# EAGLE board 1.81_Grayscale_OLED_Breakout-Panel_v10 (EAGLE 7.7.0), part 1 of 6
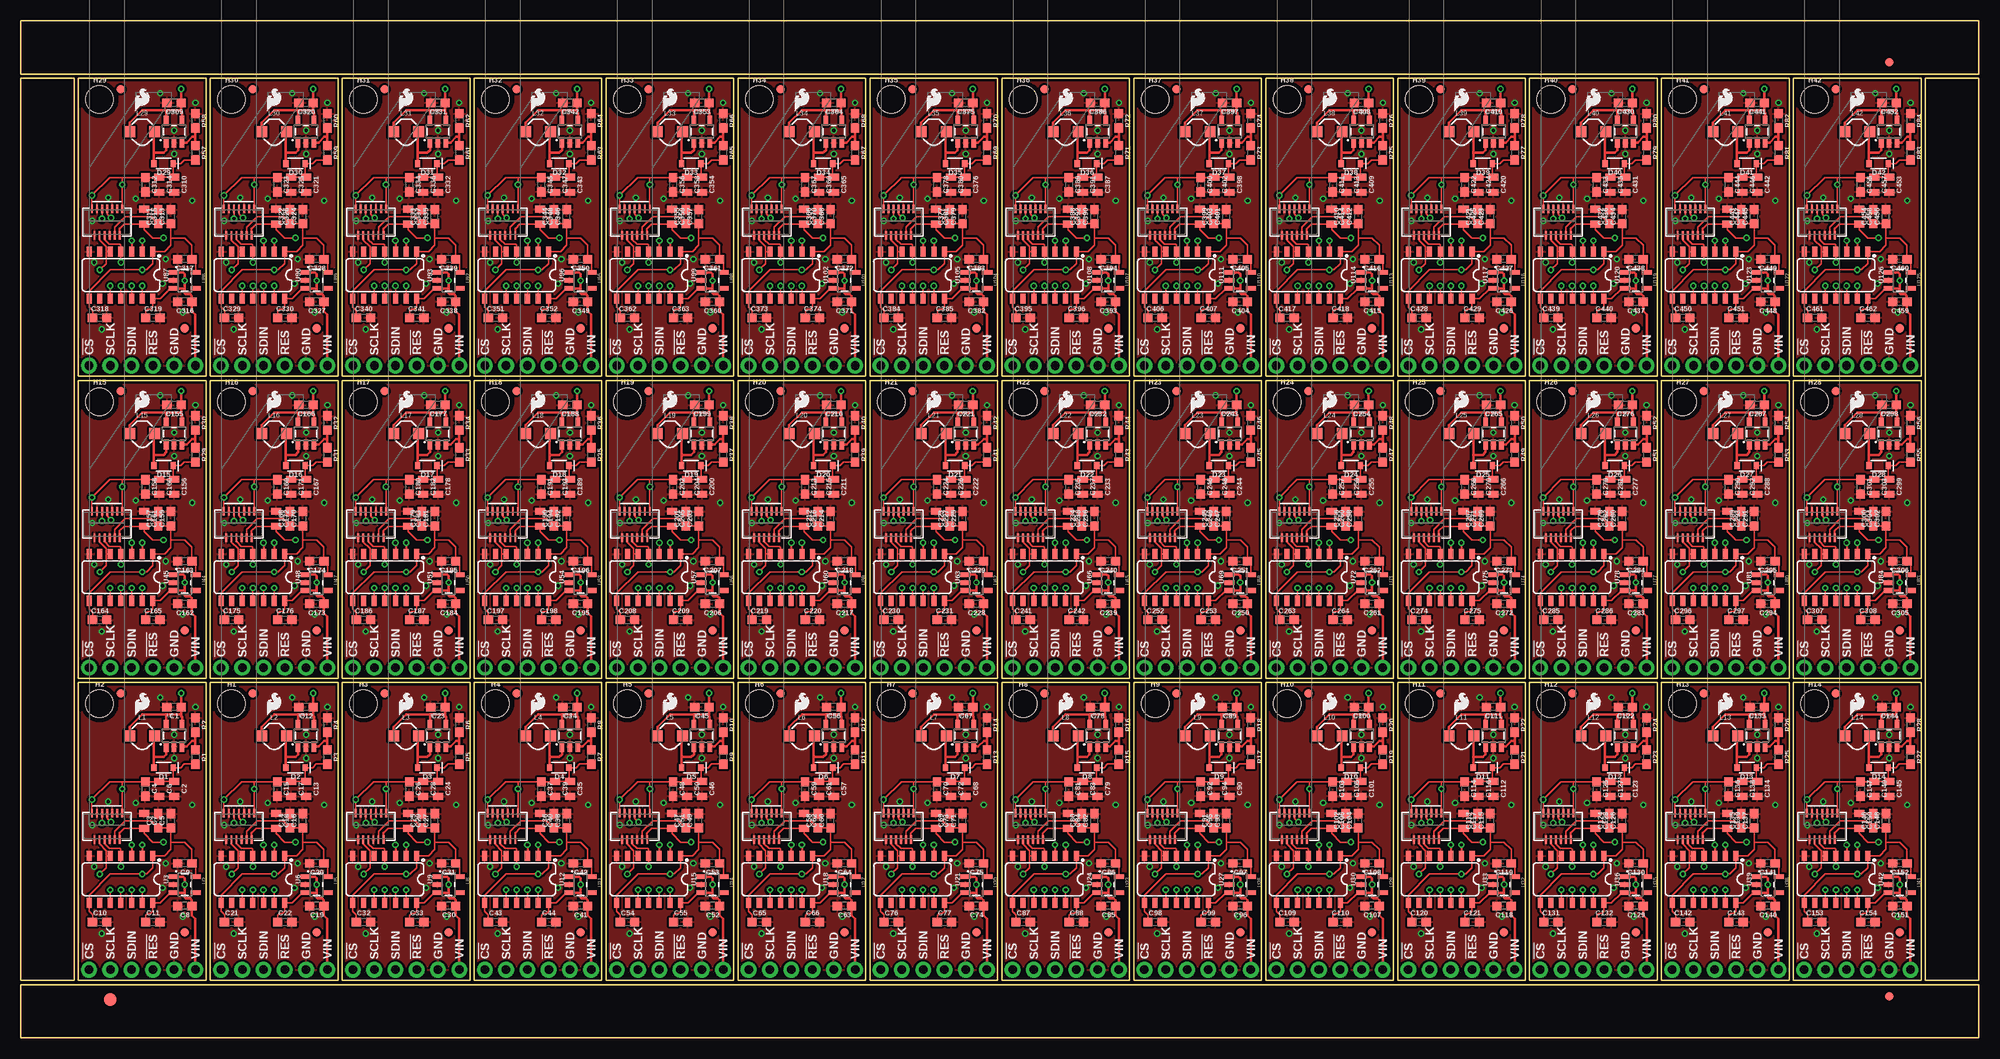
[diagram p0: board, top side]
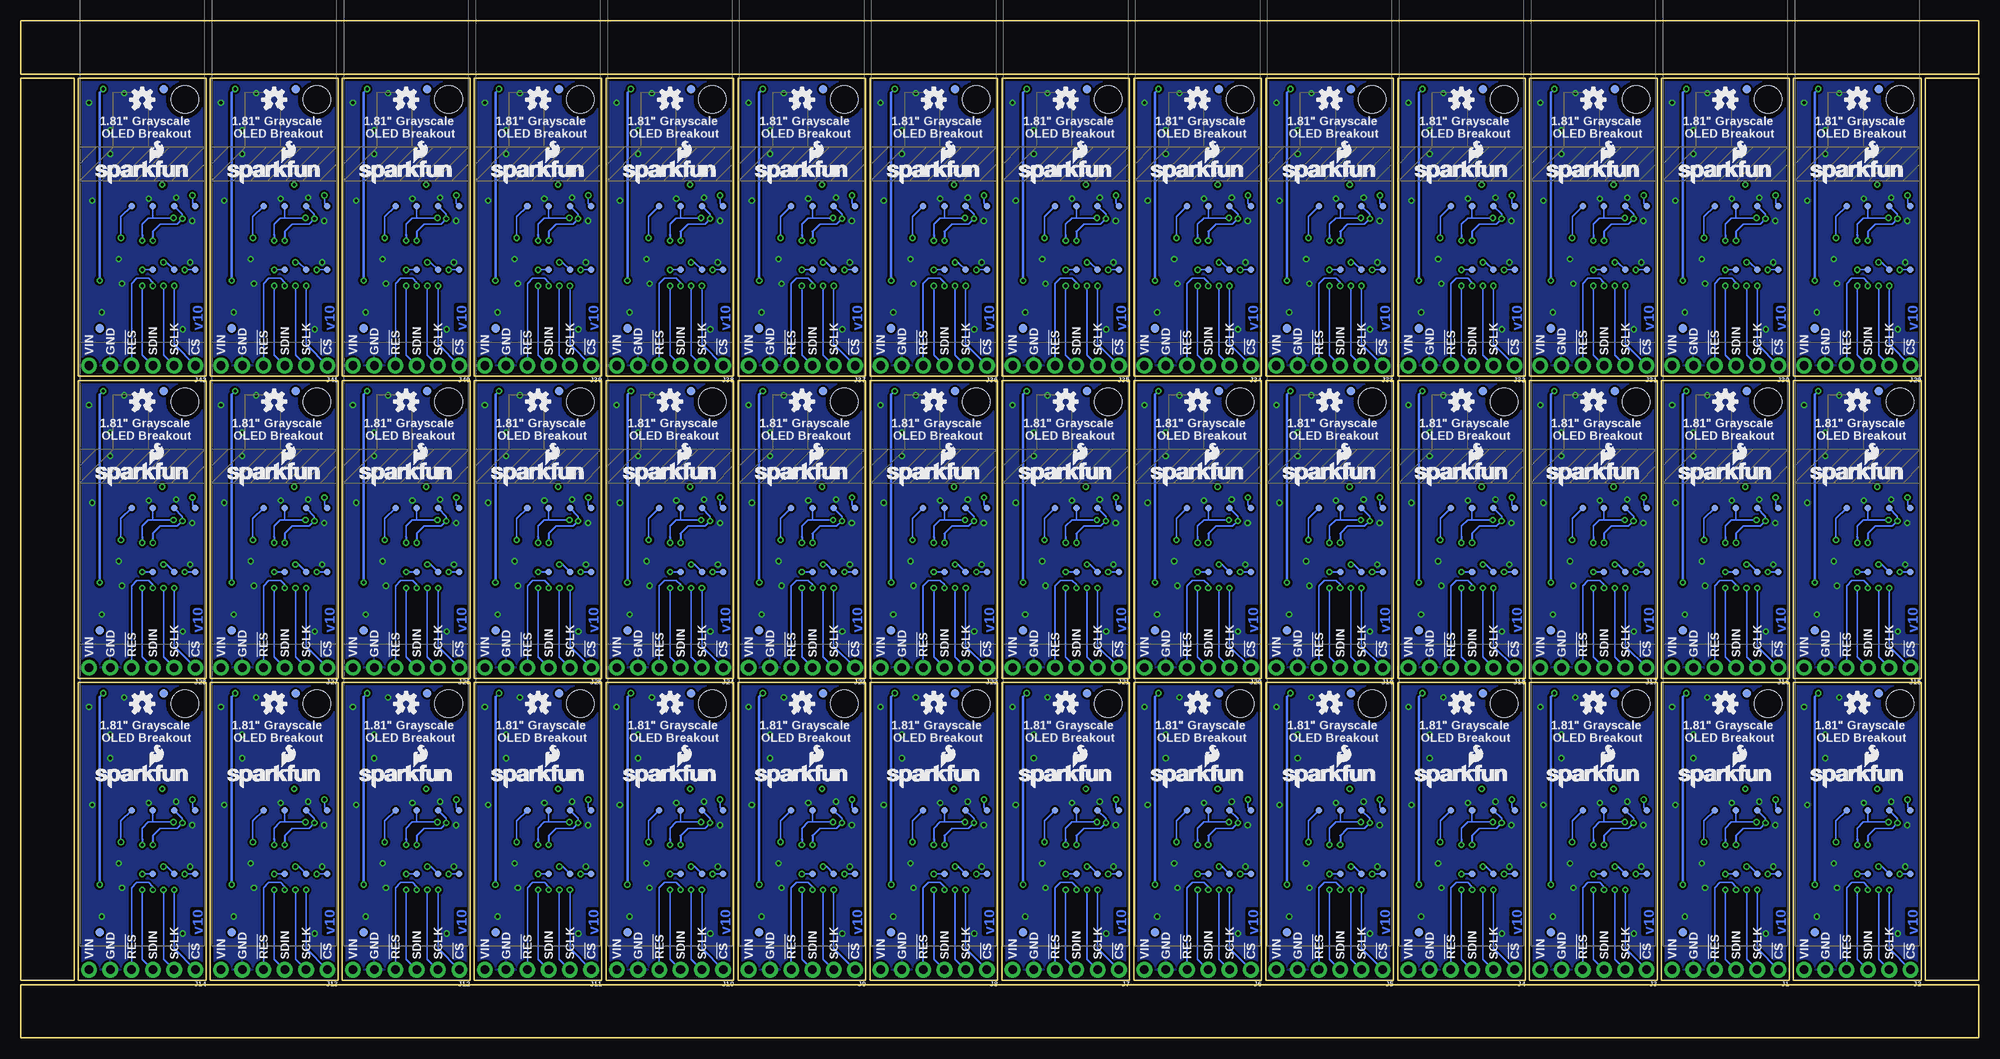
[diagram p1: board, bottom side, seen from below]

Size 233.68 x 121.41 mm. Coordinates in mm from the lower left corner, seen from the top.
Outline: 192 segments
Copper layers (1*16): Top 0.035mm / dielectric 1.5mm / Bottom 0.035mm
Design rules "SparkFun-2-layer-TIGHT": minimum track width 7mil, minimum drill 15mil, track to track 7mil, track to pad 7mil, pad to pad 7mil, via to via 7mil, smd to smd 7mil, copper to edge 7mil, drill to drill 7mil, minimum pad ring 7mil, minimum via ring 7mil, stop-mask expansion 4mil, vias tented up to drill 25mil, thermal gap 10mil

## Footprints (pad centres in the part's own frame; a part is rotated, then mirrored left to right if it is on the bottom)
0603 = smd 1.1 x 1: 1 -0.85,0; 2 0.85,0
0805 = smd 0.8 x 1.2: 1 -0.9,0; 2 0.9,0
SOD-323 = smd 0.63 x 0.83: A 1.15,0; C -1.15,0
OEL_1.8_FPC_Y3B = smd 0.23 x 1 bottom: 1 6,-11.795; 2 5.7,-14.955; 3 5.4,-11.795; 4 5.1,-14.955; 5 4.8,-11.795; 6 4.5,-14.955; 7 4.2,-11.795; 8 3.9,-14.955; 9 3.6,-11.795; 10 3.3,-14.955; 11 3,-11.795; 12 2.7,-14.955; 13 2.4,-11.795
FIDUCIAL-1.5X3 = smd 1.5 x 1.5: 1 0,0
FIDUCIAL-1X2 = smd 1 x 1: 1 0,0
STAND-OFF = hole 3.302: 0,0
1X06_NO_SILK = drill 1.016 pad 1.88: 1 0,0; 2 2.54,0; 3 5.08,0; 4 7.62,0; 5 10.16,0; 6 12.7,0
INDUCTOR_4.7UH = smd 1.3 x 1.3: P$1 -1.5,0; P$2 1.5,0
PAD.03X.03 = smd 0.762 x 0.762: P$1 0,0
SOT23-5 = smd 0.55 x 1.2: 1 -0.95,-1.3; 2 0,-1.3; 3 0.95,-1.3; 4 0.95,1.3; 5 -0.95,1.3
SO14 = smd 0.6 x 1.2: 1 -3.81,-2.8; 2 -2.54,-2.8; 3 -1.27,-2.8; 4 0,-2.8; 5 1.27,-2.8; 6 2.54,-2.8; 7 3.81,-2.8; 8 3.81,2.8; 9 2.54,2.8; 10 1.27,2.8; 11 0,2.8; 12 -1.27,2.8; 13 -2.54,2.8; 14 -3.81,2.8

## Placement (x,y rotation side)
C1  1.0uF  [0603]  18.29,39.5 180 top
C2  1.0uF  [0805]  18.29,29.72 270 top
C3  0.1uF  [0603]  16.38,25.91 90 top
C4  0.1uF/25V  [0603]  14.86,29.72 270 top
C5  1.0uF  [0603]  17.91,25.91 90 top
C6  2.2uF/25V  [0805]  16.51,29.72 270 top
C7  2.2uF/25V  [0805]  14.73,25.91 270 top
C8  1.0uF  [0603]  19.56,15.75 180 top
C9  2.2uF  [0603]  19.56,20.83 180 top
C10  0.1uF  [0603]  9.4,13.84 0 top
C11  0.1uF  [0603]  15.75,13.84 0 top
C12  1.0uF  [0603]  34.04,39.5 180 top
C13  1.0uF  [0805]  34.04,29.72 270 top
C14  0.1uF  [0603]  32.13,25.91 90 top
C15  0.1uF/25V  [0603]  30.61,29.72 270 top
C16  1.0uF  [0603]  33.66,25.91 90 top
C17  2.2uF/25V  [0805]  32.26,29.72 270 top
C18  2.2uF/25V  [0805]  30.48,25.91 270 top
C19  1.0uF  [0603]  35.31,15.75 180 top
C20  2.2uF  [0603]  35.31,20.83 180 top
C21  0.1uF  [0603]  25.15,13.84 0 top
C22  0.1uF  [0603]  31.5,13.84 0 top
C23  1.0uF  [0603]  49.78,39.5 180 top
C24  1.0uF  [0805]  49.78,29.72 270 top
C25  0.1uF  [0603]  47.88,25.91 90 top
C26  0.1uF/25V  [0603]  46.35,29.72 270 top
C27  1.0uF  [0603]  49.4,25.91 90 top
C28  2.2uF/25V  [0805]  48.01,29.72 270 top
C29  2.2uF/25V  [0805]  46.23,25.91 270 top
C30  1.0uF  [0603]  51.05,15.75 180 top
C31  2.2uF  [0603]  51.05,20.83 180 top
C32  0.1uF  [0603]  40.89,13.84 0 top
C33  0.1uF  [0603]  47.24,13.84 0 top
C34  1.0uF  [0603]  65.53,39.5 180 top
C35  1.0uF  [0805]  65.53,29.72 270 top
C36  0.1uF  [0603]  63.63,25.91 90 top
C37  0.1uF/25V  [0603]  62.1,29.72 270 top
C38  1.0uF  [0603]  65.15,25.91 90 top
C39  2.2uF/25V  [0805]  63.75,29.72 270 top
C40  2.2uF/25V  [0805]  61.98,25.91 270 top
C41  1.0uF  [0603]  66.8,15.75 180 top
C42  2.2uF  [0603]  66.8,20.83 180 top
C43  0.1uF  [0603]  56.64,13.84 0 top
C44  0.1uF  [0603]  62.99,13.84 0 top
C45  1.0uF  [0603]  81.28,39.5 180 top
C46  1.0uF  [0805]  81.28,29.72 270 top
C47  0.1uF  [0603]  79.38,25.91 90 top
C48  0.1uF/25V  [0603]  77.85,29.72 270 top
C49  1.0uF  [0603]  80.9,25.91 90 top
C50  2.2uF/25V  [0805]  79.5,29.72 270 top
C51  2.2uF/25V  [0805]  77.72,25.91 270 top
C52  1.0uF  [0603]  82.55,15.75 180 top
C53  2.2uF  [0603]  82.55,20.83 180 top
C54  0.1uF  [0603]  72.39,13.84 0 top
C55  0.1uF  [0603]  78.74,13.84 0 top
C56  1.0uF  [0603]  97.03,39.5 180 top
C57  1.0uF  [0805]  97.03,29.72 270 top
C58  0.1uF  [0603]  95.12,25.91 90 top
C59  0.1uF/25V  [0603]  93.6,29.72 270 top
C60  1.0uF  [0603]  96.65,25.91 90 top
C61  2.2uF/25V  [0805]  95.25,29.72 270 top
C62  2.2uF/25V  [0805]  93.47,25.91 270 top
C63  1.0uF  [0603]  98.3,15.75 180 top
C64  2.2uF  [0603]  98.3,20.83 180 top
C65  0.1uF  [0603]  88.14,13.84 0 top
C66  0.1uF  [0603]  94.49,13.84 0 top
C67  1.0uF  [0603]  112.78,39.5 180 top
C68  1.0uF  [0805]  112.78,29.72 270 top
C69  0.1uF  [0603]  110.87,25.91 90 top
C70  0.1uF/25V  [0603]  109.35,29.72 270 top
C71  1.0uF  [0603]  112.39,25.91 90 top
C72  2.2uF/25V  [0805]  111,29.72 270 top
C73  2.2uF/25V  [0805]  109.22,25.91 270 top
C74  1.0uF  [0603]  114.05,15.75 180 top
C75  2.2uF  [0603]  114.05,20.83 180 top
C76  0.1uF  [0603]  103.89,13.84 0 top
C77  0.1uF  [0603]  110.24,13.84 0 top
C78  1.0uF  [0603]  128.52,39.5 180 top
C79  1.0uF  [0805]  128.52,29.72 270 top
C80  0.1uF  [0603]  126.62,25.91 90 top
C81  0.1uF/25V  [0603]  125.09,29.72 270 top
C82  1.0uF  [0603]  128.14,25.91 90 top
C83  2.2uF/25V  [0805]  126.75,29.72 270 top
C84  2.2uF/25V  [0805]  124.97,25.91 270 top
C85  1.0uF  [0603]  129.79,15.75 180 top
C86  2.2uF  [0603]  129.79,20.83 180 top
C87  0.1uF  [0603]  119.63,13.84 0 top
C88  0.1uF  [0603]  125.98,13.84 0 top
C89  1.0uF  [0603]  144.27,39.5 180 top
C90  1.0uF  [0805]  144.27,29.72 270 top
C91  0.1uF  [0603]  142.37,25.91 90 top
C92  0.1uF/25V  [0603]  140.84,29.72 270 top
C93  1.0uF  [0603]  143.89,25.91 90 top
C94  2.2uF/25V  [0805]  142.49,29.72 270 top
C95  2.2uF/25V  [0805]  140.72,25.91 270 top
C96  1.0uF  [0603]  145.54,15.75 180 top
C97  2.2uF  [0603]  145.54,20.83 180 top
C98  0.1uF  [0603]  135.38,13.84 0 top
C99  0.1uF  [0603]  141.73,13.84 0 top
C100  1.0uF  [0603]  160.02,39.5 180 top
C101  1.0uF  [0805]  160.02,29.72 270 top
C102  0.1uF  [0603]  158.12,25.91 90 top
C103  0.1uF/25V  [0603]  156.59,29.72 270 top
C104  1.0uF  [0603]  159.64,25.91 90 top
C105  2.2uF/25V  [0805]  158.24,29.72 270 top
C106  2.2uF/25V  [0805]  156.46,25.91 270 top
C107  1.0uF  [0603]  161.29,15.75 180 top
C108  2.2uF  [0603]  161.29,20.83 180 top
C109  0.1uF  [0603]  151.13,13.84 0 top
C110  0.1uF  [0603]  157.48,13.84 0 top
C111  1.0uF  [0603]  175.77,39.5 180 top
C112  1.0uF  [0805]  175.77,29.72 270 top
C113  0.1uF  [0603]  173.86,25.91 90 top
C114  0.1uF/25V  [0603]  172.34,29.72 270 top
C115  1.0uF  [0603]  175.39,25.91 90 top
C116  2.2uF/25V  [0805]  173.99,29.72 270 top
C117  2.2uF/25V  [0805]  172.21,25.91 270 top
C118  1.0uF  [0603]  177.04,15.75 180 top
C119  2.2uF  [0603]  177.04,20.83 180 top
C120  0.1uF  [0603]  166.88,13.84 0 top
C121  0.1uF  [0603]  173.23,13.84 0 top
C122  1.0uF  [0603]  191.52,39.5 180 top
C123  1.0uF  [0805]  191.52,29.72 270 top
C124  0.1uF  [0603]  189.61,25.91 90 top
C125  0.1uF/25V  [0603]  188.09,29.72 270 top
C126  1.0uF  [0603]  191.13,25.91 90 top
C127  2.2uF/25V  [0805]  189.74,29.72 270 top
C128  2.2uF/25V  [0805]  187.96,25.91 270 top
C129  1.0uF  [0603]  192.79,15.75 180 top
C130  2.2uF  [0603]  192.79,20.83 180 top
C131  0.1uF  [0603]  182.63,13.84 0 top
C132  0.1uF  [0603]  188.98,13.84 0 top
C133  1.0uF  [0603]  207.26,39.5 180 top
C134  1.0uF  [0805]  207.26,29.72 270 top
C135  0.1uF  [0603]  205.36,25.91 90 top
C136  0.1uF/25V  [0603]  203.84,29.72 270 top
C137  1.0uF  [0603]  206.88,25.91 90 top
C138  2.2uF/25V  [0805]  205.49,29.72 270 top
C139  2.2uF/25V  [0805]  203.71,25.91 270 top
C140  1.0uF  [0603]  208.53,15.75 180 top
C141  2.2uF  [0603]  208.53,20.83 180 top
C142  0.1uF  [0603]  198.37,13.84 0 top
C143  0.1uF  [0603]  204.72,13.84 0 top
C144  1.0uF  [0603]  223.01,39.5 180 top
C145  1.0uF  [0805]  223.01,29.72 270 top
C146  0.1uF  [0603]  221.11,25.91 90 top
C147  0.1uF/25V  [0603]  219.58,29.72 270 top
C148  1.0uF  [0603]  222.63,25.91 90 top
C149  2.2uF/25V  [0805]  221.23,29.72 270 top
C150  2.2uF/25V  [0805]  219.46,25.91 270 top
C151  1.0uF  [0603]  224.28,15.75 180 top
C152  2.2uF  [0603]  224.28,20.83 180 top
C153  0.1uF  [0603]  214.12,13.84 0 top
C154  0.1uF  [0603]  220.47,13.84 0 top
C155  1.0uF  [0603]  18.29,75.56 180 top
C156  1.0uF  [0805]  18.29,65.79 270 top
C157  0.1uF  [0603]  16.38,61.98 90 top
C158  0.1uF/25V  [0603]  14.86,65.79 270 top
C159  1.0uF  [0603]  17.91,61.98 90 top
C160  2.2uF/25V  [0805]  16.51,65.79 270 top
C161  2.2uF/25V  [0805]  14.73,61.98 270 top
C162  1.0uF  [0603]  19.56,51.82 180 top
C163  2.2uF  [0603]  19.56,56.9 180 top
C164  0.1uF  [0603]  9.4,49.91 0 top
C165  0.1uF  [0603]  15.75,49.91 0 top
C166  1.0uF  [0603]  34.04,75.56 180 top
C167  1.0uF  [0805]  34.04,65.79 270 top
C168  0.1uF  [0603]  32.13,61.98 90 top
C169  0.1uF/25V  [0603]  30.61,65.79 270 top
C170  1.0uF  [0603]  33.66,61.98 90 top
C171  2.2uF/25V  [0805]  32.26,65.79 270 top
C172  2.2uF/25V  [0805]  30.48,61.98 270 top
C173  1.0uF  [0603]  35.31,51.82 180 top
C174  2.2uF  [0603]  35.31,56.9 180 top
C175  0.1uF  [0603]  25.15,49.91 0 top
C176  0.1uF  [0603]  31.5,49.91 0 top
C177  1.0uF  [0603]  49.78,75.56 180 top
C178  1.0uF  [0805]  49.78,65.79 270 top
C179  0.1uF  [0603]  47.88,61.98 90 top
C180  0.1uF/25V  [0603]  46.35,65.79 270 top
C181  1.0uF  [0603]  49.4,61.98 90 top
C182  2.2uF/25V  [0805]  48.01,65.79 270 top
C183  2.2uF/25V  [0805]  46.23,61.98 270 top
C184  1.0uF  [0603]  51.05,51.82 180 top
C185  2.2uF  [0603]  51.05,56.9 180 top
C186  0.1uF  [0603]  40.89,49.91 0 top
C187  0.1uF  [0603]  47.24,49.91 0 top
C188  1.0uF  [0603]  65.53,75.56 180 top
C189  1.0uF  [0805]  65.53,65.79 270 top
C190  0.1uF  [0603]  63.63,61.98 90 top
C191  0.1uF/25V  [0603]  62.1,65.79 270 top
C192  1.0uF  [0603]  65.15,61.98 90 top
C193  2.2uF/25V  [0805]  63.75,65.79 270 top
C194  2.2uF/25V  [0805]  61.98,61.98 270 top
C195  1.0uF  [0603]  66.8,51.82 180 top
C196  2.2uF  [0603]  66.8,56.9 180 top
C197  0.1uF  [0603]  56.64,49.91 0 top
C198  0.1uF  [0603]  62.99,49.91 0 top
C199  1.0uF  [0603]  81.28,75.56 180 top
C200  1.0uF  [0805]  81.28,65.79 270 top
C201  0.1uF  [0603]  79.38,61.98 90 top
C202  0.1uF/25V  [0603]  77.85,65.79 270 top
C203  1.0uF  [0603]  80.9,61.98 90 top
C204  2.2uF/25V  [0805]  79.5,65.79 270 top
C205  2.2uF/25V  [0805]  77.72,61.98 270 top
C206  1.0uF  [0603]  82.55,51.82 180 top
C207  2.2uF  [0603]  82.55,56.9 180 top
C208  0.1uF  [0603]  72.39,49.91 0 top
C209  0.1uF  [0603]  78.74,49.91 0 top
C210  1.0uF  [0603]  97.03,75.56 180 top
C211  1.0uF  [0805]  97.03,65.79 270 top
C212  0.1uF  [0603]  95.12,61.98 90 top
C213  0.1uF/25V  [0603]  93.6,65.79 270 top
C214  1.0uF  [0603]  96.65,61.98 90 top
C215  2.2uF/25V  [0805]  95.25,65.79 270 top
C216  2.2uF/25V  [0805]  93.47,61.98 270 top
C217  1.0uF  [0603]  98.3,51.82 180 top
C218  2.2uF  [0603]  98.3,56.9 180 top
C219  0.1uF  [0603]  88.14,49.91 0 top
C220  0.1uF  [0603]  94.49,49.91 0 top
C221  1.0uF  [0603]  112.78,75.56 180 top
C222  1.0uF  [0805]  112.78,65.79 270 top
C223  0.1uF  [0603]  110.87,61.98 90 top
C224  0.1uF/25V  [0603]  109.35,65.79 270 top
C225  1.0uF  [0603]  112.39,61.98 90 top
C226  2.2uF/25V  [0805]  111,65.79 270 top
C227  2.2uF/25V  [0805]  109.22,61.98 270 top
C228  1.0uF  [0603]  114.05,51.82 180 top
C229  2.2uF  [0603]  114.05,56.9 180 top
C230  0.1uF  [0603]  103.89,49.91 0 top
C231  0.1uF  [0603]  110.24,49.91 0 top
C232  1.0uF  [0603]  128.52,75.56 180 top
C233  1.0uF  [0805]  128.52,65.79 270 top
C234  0.1uF  [0603]  126.62,61.98 90 top
C235  0.1uF/25V  [0603]  125.09,65.79 270 top
C236  1.0uF  [0603]  128.14,61.98 90 top
C237  2.2uF/25V  [0805]  126.75,65.79 270 top
C238  2.2uF/25V  [0805]  124.97,61.98 270 top
C239  1.0uF  [0603]  129.79,51.82 180 top
C240  2.2uF  [0603]  129.79,56.9 180 top
C241  0.1uF  [0603]  119.63,49.91 0 top
C242  0.1uF  [0603]  125.98,49.91 0 top
C243  1.0uF  [0603]  144.27,75.56 180 top
C244  1.0uF  [0805]  144.27,65.79 270 top
C245  0.1uF  [0603]  142.37,61.98 90 top
C246  0.1uF/25V  [0603]  140.84,65.79 270 top
C247  1.0uF  [0603]  143.89,61.98 90 top
C248  2.2uF/25V  [0805]  142.49,65.79 270 top
C249  2.2uF/25V  [0805]  140.72,61.98 270 top
C250  1.0uF  [0603]  145.54,51.82 180 top
C251  2.2uF  [0603]  145.54,56.9 180 top
C252  0.1uF  [0603]  135.38,49.91 0 top
C253  0.1uF  [0603]  141.73,49.91 0 top
C254  1.0uF  [0603]  160.02,75.56 180 top
C255  1.0uF  [0805]  160.02,65.79 270 top
C256  0.1uF  [0603]  158.12,61.98 90 top
C257  0.1uF/25V  [0603]  156.59,65.79 270 top
C258  1.0uF  [0603]  159.64,61.98 90 top
C259  2.2uF/25V  [0805]  158.24,65.79 270 top
C260  2.2uF/25V  [0805]  156.46,61.98 270 top
C261  1.0uF  [0603]  161.29,51.82 180 top
C262  2.2uF  [0603]  161.29,56.9 180 top
C263  0.1uF  [0603]  151.13,49.91 0 top
C264  0.1uF  [0603]  157.48,49.91 0 top
C265  1.0uF  [0603]  175.77,75.56 180 top
C266  1.0uF  [0805]  175.77,65.79 270 top
C267  0.1uF  [0603]  173.86,61.98 90 top
C268  0.1uF/25V  [0603]  172.34,65.79 270 top
C269  1.0uF  [0603]  175.39,61.98 90 top
C270  2.2uF/25V  [0805]  173.99,65.79 270 top
C271  2.2uF/25V  [0805]  172.21,61.98 270 top
C272  1.0uF  [0603]  177.04,51.82 180 top
C273  2.2uF  [0603]  177.04,56.9 180 top
C274  0.1uF  [0603]  166.88,49.91 0 top
C275  0.1uF  [0603]  173.23,49.91 0 top
C276  1.0uF  [0603]  191.52,75.56 180 top
C277  1.0uF  [0805]  191.52,65.79 270 top
C278  0.1uF  [0603]  189.61,61.98 90 top
C279  0.1uF/25V  [0603]  188.09,65.79 270 top
C280  1.0uF  [0603]  191.13,61.98 90 top
C281  2.2uF/25V  [0805]  189.74,65.79 270 top
C282  2.2uF/25V  [0805]  187.96,61.98 270 top
C283  1.0uF  [0603]  192.79,51.82 180 top
C284  2.2uF  [0603]  192.79,56.9 180 top
C285  0.1uF  [0603]  182.63,49.91 0 top
C286  0.1uF  [0603]  188.98,49.91 0 top
C287  1.0uF  [0603]  207.26,75.56 180 top
C288  1.0uF  [0805]  207.26,65.79 270 top
C289  0.1uF  [0603]  205.36,61.98 90 top
C290  0.1uF/25V  [0603]  203.84,65.79 270 top
C291  1.0uF  [0603]  206.88,61.98 90 top
C292  2.2uF/25V  [0805]  205.49,65.79 270 top
C293  2.2uF/25V  [0805]  203.71,61.98 270 top
C294  1.0uF  [0603]  208.53,51.82 180 top
C295  2.2uF  [0603]  208.53,56.9 180 top
C296  0.1uF  [0603]  198.37,49.91 0 top
C297  0.1uF  [0603]  204.72,49.91 0 top
C298  1.0uF  [0603]  223.01,75.56 180 top
C299  1.0uF  [0805]  223.01,65.79 270 top
C300  0.1uF  [0603]  221.11,61.98 90 top
C301  0.1uF/25V  [0603]  219.58,65.79 270 top
C302  1.0uF  [0603]  222.63,61.98 90 top
C303  2.2uF/25V  [0805]  221.23,65.79 270 top
C304  2.2uF/25V  [0805]  219.46,61.98 270 top
C305  1.0uF  [0603]  224.28,51.82 180 top
C306  2.2uF  [0603]  224.28,56.9 180 top
C307  0.1uF  [0603]  214.12,49.91 0 top
C308  0.1uF  [0603]  220.47,49.91 0 top
C309  1.0uF  [0603]  18.29,111.63 180 top
C310  1.0uF  [0805]  18.29,101.85 270 top
C311  0.1uF  [0603]  16.38,98.04 90 top
C312  0.1uF/25V  [0603]  14.86,101.85 270 top
C313  1.0uF  [0603]  17.91,98.04 90 top
C314  2.2uF/25V  [0805]  16.51,101.85 270 top
C315  2.2uF/25V  [0805]  14.73,98.04 270 top
C316  1.0uF  [0603]  19.56,87.88 180 top
C317  2.2uF  [0603]  19.56,92.96 180 top
C318  0.1uF  [0603]  9.4,85.98 0 top
C319  0.1uF  [0603]  15.75,85.98 0 top
C320  1.0uF  [0603]  34.04,111.63 180 top
C321  1.0uF  [0805]  34.04,101.85 270 top
C322  0.1uF  [0603]  32.13,98.04 90 top
C323  0.1uF/25V  [0603]  30.61,101.85 270 top
C324  1.0uF  [0603]  33.66,98.04 90 top
C325  2.2uF/25V  [0805]  32.26,101.85 270 top
C326  2.2uF/25V  [0805]  30.48,98.04 270 top
C327  1.0uF  [0603]  35.31,87.88 180 top
C328  2.2uF  [0603]  35.31,92.96 180 top
C329  0.1uF  [0603]  25.15,85.98 0 top
C330  0.1uF  [0603]  31.5,85.98 0 top
C331  1.0uF  [0603]  49.78,111.63 180 top
C332  1.0uF  [0805]  49.78,101.85 270 top
C333  0.1uF  [0603]  47.88,98.04 90 top
C334  0.1uF/25V  [0603]  46.35,101.85 270 top
C335  1.0uF  [0603]  49.4,98.04 90 top
C336  2.2uF/25V  [0805]  48.01,101.85 270 top
C337  2.2uF/25V  [0805]  46.23,98.04 270 top
C338  1.0uF  [0603]  51.05,87.88 180 top
C339  2.2uF  [0603]  51.05,92.96 180 top
C340  0.1uF  [0603]  40.89,85.98 0 top
C341  0.1uF  [0603]  47.24,85.98 0 top
C342  1.0uF  [0603]  65.53,111.63 180 top
C343  1.0uF  [0805]  65.53,101.85 270 top
C344  0.1uF  [0603]  63.63,98.04 90 top
C345  0.1uF/25V  [0603]  62.1,101.85 270 top
C346  1.0uF  [0603]  65.15,98.04 90 top
C347  2.2uF/25V  [0805]  63.75,101.85 270 top
C348  2.2uF/25V  [0805]  61.98,98.04 270 top
C349  1.0uF  [0603]  66.8,87.88 180 top
C350  2.2uF  [0603]  66.8,92.96 180 top
C351  0.1uF  [0603]  56.64,85.98 0 top
C352  0.1uF  [0603]  62.99,85.98 0 top
C353  1.0uF  [0603]  81.28,111.63 180 top
C354  1.0uF  [0805]  81.28,101.85 270 top
C355  0.1uF  [0603]  79.38,98.04 90 top
C356  0.1uF/25V  [0603]  77.85,101.85 270 top
C357  1.0uF  [0603]  80.9,98.04 90 top
C358  2.2uF/25V  [0805]  79.5,101.85 270 top
C359  2.2uF/25V  [0805]  77.72,98.04 270 top
C360  1.0uF  [0603]  82.55,87.88 180 top
C361  2.2uF  [0603]  82.55,92.96 180 top
C362  0.1uF  [0603]  72.39,85.98 0 top
C363  0.1uF  [0603]  78.74,85.98 0 top
C364  1.0uF  [0603]  97.03,111.63 180 top
C365  1.0uF  [0805]  97.03,101.85 270 top
C366  0.1uF  [0603]  95.12,98.04 90 top
C367  0.1uF/25V  [0603]  93.6,101.85 270 top
C368  1.0uF  [0603]  96.65,98.04 90 top
C369  2.2uF/25V  [0805]  95.25,101.85 270 top
C370  2.2uF/25V  [0805]  93.47,98.04 270 top
C371  1.0uF  [0603]  98.3,87.88 180 top
C372  2.2uF  [0603]  98.3,92.96 180 top
C373  0.1uF  [0603]  88.14,85.98 0 top
C374  0.1uF  [0603]  94.49,85.98 0 top
C375  1.0uF  [0603]  112.78,111.63 180 top
C376  1.0uF  [0805]  112.78,101.85 270 top
C377  0.1uF  [0603]  110.87,98.04 90 top
C378  0.1uF/25V  [0603]  109.35,101.85 270 top
C379  1.0uF  [0603]  112.39,98.04 90 top
C380  2.2uF/25V  [0805]  111,101.85 270 top
C381  2.2uF/25V  [0805]  109.22,98.04 270 top
C382  1.0uF  [0603]  114.05,87.88 180 top
C383  2.2uF  [0603]  114.05,92.96 180 top
C384  0.1uF  [0603]  103.89,85.98 0 top
C385  0.1uF  [0603]  110.24,85.98 0 top
C386  1.0uF  [0603]  128.52,111.63 180 top
C387  1.0uF  [0805]  128.52,101.85 270 top
C388  0.1uF  [0603]  126.62,98.04 90 top
C389  0.1uF/25V  [0603]  125.09,101.85 270 top
C390  1.0uF  [0603]  128.14,98.04 90 top
C391  2.2uF/25V  [0805]  126.75,101.85 270 top
C392  2.2uF/25V  [0805]  124.97,98.04 270 top
C393  1.0uF  [0603]  129.79,87.88 180 top
C394  2.2uF  [0603]  129.79,92.96 180 top
C395  0.1uF  [0603]  119.63,85.98 0 top
C396  0.1uF  [0603]  125.98,85.98 0 top
C397  1.0uF  [0603]  144.27,111.63 180 top
C398  1.0uF  [0805]  144.27,101.85 270 top
C399  0.1uF  [0603]  142.37,98.04 90 top
C400  0.1uF/25V  [0603]  140.84,101.85 270 top
C401  1.0uF  [0603]  143.89,98.04 90 top
C402  2.2uF/25V  [0805]  142.49,101.85 270 top
C403  2.2uF/25V  [0805]  140.72,98.04 270 top
C404  1.0uF  [0603]  145.54,87.88 180 top
C405  2.2uF  [0603]  145.54,92.96 180 top
C406  0.1uF  [0603]  135.38,85.98 0 top
C407  0.1uF  [0603]  141.73,85.98 0 top
C408  1.0uF  [0603]  160.02,111.63 180 top
C409  1.0uF  [0805]  160.02,101.85 270 top
C410  0.1uF  [0603]  158.12,98.04 90 top
C411  0.1uF/25V  [0603]  156.59,101.85 270 top
C412  1.0uF  [0603]  159.64,98.04 90 top
C413  2.2uF/25V  [0805]  158.24,101.85 270 top
C414  2.2uF/25V  [0805]  156.46,98.04 270 top
C415  1.0uF  [0603]  161.29,87.88 180 top
C416  2.2uF  [0603]  161.29,92.96 180 top
C417  0.1uF  [0603]  151.13,85.98 0 top
C418  0.1uF  [0603]  157.48,85.98 0 top
C419  1.0uF  [0603]  175.77,111.63 180 top
C420  1.0uF  [0805]  175.77,101.85 270 top
C421  0.1uF  [0603]  173.86,98.04 90 top
C422  0.1uF/25V  [0603]  172.34,101.85 270 top
C423  1.0uF  [0603]  175.39,98.04 90 top
C424  2.2uF/25V  [0805]  173.99,101.85 270 top
C425  2.2uF/25V  [0805]  172.21,98.04 270 top
C426  1.0uF  [0603]  177.04,87.88 180 top
C427  2.2uF  [0603]  177.04,92.96 180 top
C428  0.1uF  [0603]  166.88,85.98 0 top
C429  0.1uF  [0603]  173.23,85.98 0 top
C430  1.0uF  [0603]  191.52,111.63 180 top
C431  1.0uF  [0805]  191.52,101.85 270 top
C432  0.1uF  [0603]  189.61,98.04 90 top
C433  0.1uF/25V  [0603]  188.09,101.85 270 top
C434  1.0uF  [0603]  191.13,98.04 90 top
C435  2.2uF/25V  [0805]  189.74,101.85 270 top
C436  2.2uF/25V  [0805]  187.96,98.04 270 top
C437  1.0uF  [0603]  192.79,87.88 180 top
C438  2.2uF  [0603]  192.79,92.96 180 top
C439  0.1uF  [0603]  182.63,85.98 0 top
C440  0.1uF  [0603]  188.98,85.98 0 top
C441  1.0uF  [0603]  207.26,111.63 180 top
C442  1.0uF  [0805]  207.26,101.85 270 top
C443  0.1uF  [0603]  205.36,98.04 90 top
C444  0.1uF/25V  [0603]  203.84,101.85 270 top
C445  1.0uF  [0603]  206.88,98.04 90 top
C446  2.2uF/25V  [0805]  205.49,101.85 270 top
C447  2.2uF/25V  [0805]  203.71,98.04 270 top
C448  1.0uF  [0603]  208.53,87.88 180 top
C449  2.2uF  [0603]  208.53,92.96 180 top
C450  0.1uF  [0603]  198.37,85.98 0 top
C451  0.1uF  [0603]  204.72,85.98 0 top
C452  1.0uF  [0603]  223.01,111.63 180 top
C453  1.0uF  [0805]  223.01,101.85 270 top
C454  0.1uF  [0603]  221.11,98.04 90 top
C455  0.1uF/25V  [0603]  219.58,101.85 270 top
C456  1.0uF  [0603]  222.63,98.04 90 top
C457  2.2uF/25V  [0805]  221.23,101.85 270 top
C458  2.2uF/25V  [0805]  219.46,98.04 270 top
C459  1.0uF  [0603]  224.28,87.88 180 top
C460  2.2uF  [0603]  224.28,92.96 180 top
C461  0.1uF  [0603]  214.12,85.98 0 top
C462  0.1uF  [0603]  220.47,85.98 0 top
D1  1A/23V/620mV  [SOD-323]  17.02,32.26 180 top
D2  1A/23V/620mV  [SOD-323]  32.77,32.26 180 top
D3  1A/23V/620mV  [SOD-323]  48.51,32.26 180 top
D4  1A/23V/620mV  [SOD-323]  64.26,32.26 180 top
D5  1A/23V/620mV  [SOD-323]  80.01,32.26 180 top
D6  1A/23V/620mV  [SOD-323]  95.76,32.26 180 top
D7  1A/23V/620mV  [SOD-323]  111.51,32.26 180 top
D8  1A/23V/620mV  [SOD-323]  127.25,32.26 180 top
D9  1A/23V/620mV  [SOD-323]  143,32.26 180 top
D10  1A/23V/620mV  [SOD-323]  158.75,32.26 180 top
D11  1A/23V/620mV  [SOD-323]  174.5,32.26 180 top
D12  1A/23V/620mV  [SOD-323]  190.25,32.26 180 top
D13  1A/23V/620mV  [SOD-323]  205.99,32.26 180 top
D14  1A/23V/620mV  [SOD-323]  221.74,32.26 180 top
D15  1A/23V/620mV  [SOD-323]  17.02,68.33 180 top
D16  1A/23V/620mV  [SOD-323]  32.77,68.33 180 top
D17  1A/23V/620mV  [SOD-323]  48.51,68.33 180 top
D18  1A/23V/620mV  [SOD-323]  64.26,68.33 180 top
D19  1A/23V/620mV  [SOD-323]  80.01,68.33 180 top
D20  1A/23V/620mV  [SOD-323]  95.76,68.33 180 top
D21  1A/23V/620mV  [SOD-323]  111.51,68.33 180 top
D22  1A/23V/620mV  [SOD-323]  127.25,68.33 180 top
D23  1A/23V/620mV  [SOD-323]  143,68.33 180 top
D24  1A/23V/620mV  [SOD-323]  158.75,68.33 180 top
D25  1A/23V/620mV  [SOD-323]  174.5,68.33 180 top
D26  1A/23V/620mV  [SOD-323]  190.25,68.33 180 top
D27  1A/23V/620mV  [SOD-323]  205.99,68.33 180 top
D28  1A/23V/620mV  [SOD-323]  221.74,68.33 180 top
D29  1A/23V/620mV  [SOD-323]  17.02,104.39 180 top
D30  1A/23V/620mV  [SOD-323]  32.77,104.39 180 top
D31  1A/23V/620mV  [SOD-323]  48.51,104.39 180 top
D32  1A/23V/620mV  [SOD-323]  64.26,104.39 180 top
D33  1A/23V/620mV  [SOD-323]  80.01,104.39 180 top
D34  1A/23V/620mV  [SOD-323]  95.76,104.39 180 top
D35  1A/23V/620mV  [SOD-323]  111.51,104.39 180 top
D36  1A/23V/620mV  [SOD-323]  127.25,104.39 180 top
D37  1A/23V/620mV  [SOD-323]  143,104.39 180 top
D38  1A/23V/620mV  [SOD-323]  158.75,104.39 180 top
D39  1A/23V/620mV  [SOD-323]  174.5,104.39 180 top
D40  1A/23V/620mV  [SOD-323]  190.25,104.39 180 top
D41  1A/23V/620mV  [SOD-323]  205.99,104.39 180 top
D42  1A/23V/620mV  [SOD-323]  221.74,104.39 180 top
DS1  OEL_1.8OEL_Y3B  [OEL_1.8_FPC_Y3B]  14.48,38.61 0 bottom
DS2  OEL_1.8OEL_Y3B  [OEL_1.8_FPC_Y3B]  30.23,38.61 0 bottom
DS3  OEL_1.8OEL_Y3B  [OEL_1.8_FPC_Y3B]  45.97,38.61 0 bottom
DS4  OEL_1.8OEL_Y3B  [OEL_1.8_FPC_Y3B]  61.72,38.61 0 bottom
DS5  OEL_1.8OEL_Y3B  [OEL_1.8_FPC_Y3B]  77.47,38.61 0 bottom
DS6  OEL_1.8OEL_Y3B  [OEL_1.8_FPC_Y3B]  93.22,38.61 0 bottom
DS7  OEL_1.8OEL_Y3B  [OEL_1.8_FPC_Y3B]  108.97,38.61 0 bottom
DS8  OEL_1.8OEL_Y3B  [OEL_1.8_FPC_Y3B]  124.71,38.61 0 bottom
DS9  OEL_1.8OEL_Y3B  [OEL_1.8_FPC_Y3B]  140.46,38.61 0 bottom
DS10  OEL_1.8OEL_Y3B  [OEL_1.8_FPC_Y3B]  156.21,38.61 0 bottom
DS11  OEL_1.8OEL_Y3B  [OEL_1.8_FPC_Y3B]  171.96,38.61 0 bottom
DS12  OEL_1.8OEL_Y3B  [OEL_1.8_FPC_Y3B]  187.71,38.61 0 bottom
DS13  OEL_1.8OEL_Y3B  [OEL_1.8_FPC_Y3B]  203.45,38.61 0 bottom
DS14  OEL_1.8OEL_Y3B  [OEL_1.8_FPC_Y3B]  219.2,38.61 0 bottom
DS15  OEL_1.8OEL_Y3B  [OEL_1.8_FPC_Y3B]  14.48,74.68 0 bottom
DS16  OEL_1.8OEL_Y3B  [OEL_1.8_FPC_Y3B]  30.23,74.68 0 bottom
DS17  OEL_1.8OEL_Y3B  [OEL_1.8_FPC_Y3B]  45.97,74.68 0 bottom
DS18  OEL_1.8OEL_Y3B  [OEL_1.8_FPC_Y3B]  61.72,74.68 0 bottom
DS19  OEL_1.8OEL_Y3B  [OEL_1.8_FPC_Y3B]  77.47,74.68 0 bottom
DS20  OEL_1.8OEL_Y3B  [OEL_1.8_FPC_Y3B]  93.22,74.68 0 bottom
DS21  OEL_1.8OEL_Y3B  [OEL_1.8_FPC_Y3B]  108.97,74.68 0 bottom
DS22  OEL_1.8OEL_Y3B  [OEL_1.8_FPC_Y3B]  124.71,74.68 0 bottom
DS23  OEL_1.8OEL_Y3B  [OEL_1.8_FPC_Y3B]  140.46,74.68 0 bottom
DS24  OEL_1.8OEL_Y3B  [OEL_1.8_FPC_Y3B]  156.21,74.68 0 bottom
DS25  OEL_1.8OEL_Y3B  [OEL_1.8_FPC_Y3B]  171.96,74.68 0 bottom
DS26  OEL_1.8OEL_Y3B  [OEL_1.8_FPC_Y3B]  187.71,74.68 0 bottom
DS27  OEL_1.8OEL_Y3B  [OEL_1.8_FPC_Y3B]  203.45,74.68 0 bottom
DS28  OEL_1.8OEL_Y3B  [OEL_1.8_FPC_Y3B]  219.2,74.68 0 bottom
DS29  OEL_1.8OEL_Y3B  [OEL_1.8_FPC_Y3B]  14.48,110.74 0 bottom
DS30  OEL_1.8OEL_Y3B  [OEL_1.8_FPC_Y3B]  30.23,110.74 0 bottom
DS31  OEL_1.8OEL_Y3B  [OEL_1.8_FPC_Y3B]  45.97,110.74 0 bottom
DS32  OEL_1.8OEL_Y3B  [OEL_1.8_FPC_Y3B]  61.72,110.74 0 bottom
DS33  OEL_1.8OEL_Y3B  [OEL_1.8_FPC_Y3B]  77.47,110.74 0 bottom
DS34  OEL_1.8OEL_Y3B  [OEL_1.8_FPC_Y3B]  93.22,110.74 0 bottom
DS35  OEL_1.8OEL_Y3B  [OEL_1.8_FPC_Y3B]  108.97,110.74 0 bottom
DS36  OEL_1.8OEL_Y3B  [OEL_1.8_FPC_Y3B]  124.71,110.74 0 bottom
DS37  OEL_1.8OEL_Y3B  [OEL_1.8_FPC_Y3B]  140.46,110.74 0 bottom
DS38  OEL_1.8OEL_Y3B  [OEL_1.8_FPC_Y3B]  156.21,110.74 0 bottom
DS39  OEL_1.8OEL_Y3B  [OEL_1.8_FPC_Y3B]  171.96,110.74 0 bottom
DS40  OEL_1.8OEL_Y3B  [OEL_1.8_FPC_Y3B]  187.71,110.74 0 bottom
DS41  OEL_1.8OEL_Y3B  [OEL_1.8_FPC_Y3B]  203.45,110.74 0 bottom
DS42  OEL_1.8OEL_Y3B  [OEL_1.8_FPC_Y3B]  219.2,110.74 0 bottom
E$1  [FIDUCIAL-1.5X3]  10.67,4.57 0 top
E$5  [FIDUCIAL-1X2]  223.01,116.46 270 top
E$6  [FIDUCIAL-1X2]  223.01,4.95 90 top
FD1  FIDUCIAL1X2  [FIDUCIAL-1X2]  19.56,12.57 0 top
FD2  FIDUCIAL1X2  [FIDUCIAL-1X2]  11.94,41.15 0 top
FD3  FIDUCIAL1X2  [FIDUCIAL-1X2]  19.56,12.57 0 bottom
FD4  FIDUCIAL1X2  [FIDUCIAL-1X2]  11.94,41.15 0 bottom
FD5  FIDUCIAL1X2  [FIDUCIAL-1X2]  35.31,12.57 0 top
FD6  FIDUCIAL1X2  [FIDUCIAL-1X2]  27.69,41.15 0 top
FD7  FIDUCIAL1X2  [FIDUCIAL-1X2]  35.31,12.57 0 bottom
FD8  FIDUCIAL1X2  [FIDUCIAL-1X2]  27.69,41.15 0 bottom
FD9  FIDUCIAL1X2  [FIDUCIAL-1X2]  51.05,12.57 0 top
FD10  FIDUCIAL1X2  [FIDUCIAL-1X2]  43.43,41.15 0 top
FD11  FIDUCIAL1X2  [FIDUCIAL-1X2]  51.05,12.57 0 bottom
FD12  FIDUCIAL1X2  [FIDUCIAL-1X2]  43.43,41.15 0 bottom
FD13  FIDUCIAL1X2  [FIDUCIAL-1X2]  66.8,12.57 0 top
FD14  FIDUCIAL1X2  [FIDUCIAL-1X2]  59.18,41.15 0 top
FD15  FIDUCIAL1X2  [FIDUCIAL-1X2]  66.8,12.57 0 bottom
FD16  FIDUCIAL1X2  [FIDUCIAL-1X2]  59.18,41.15 0 bottom
FD17  FIDUCIAL1X2  [FIDUCIAL-1X2]  82.55,12.57 0 top
FD18  FIDUCIAL1X2  [FIDUCIAL-1X2]  74.93,41.15 0 top
FD19  FIDUCIAL1X2  [FIDUCIAL-1X2]  82.55,12.57 0 bottom
FD20  FIDUCIAL1X2  [FIDUCIAL-1X2]  74.93,41.15 0 bottom
FD21  FIDUCIAL1X2  [FIDUCIAL-1X2]  98.3,12.57 0 top
FD22  FIDUCIAL1X2  [FIDUCIAL-1X2]  90.68,41.15 0 top
FD23  FIDUCIAL1X2  [FIDUCIAL-1X2]  98.3,12.57 0 bottom
FD24  FIDUCIAL1X2  [FIDUCIAL-1X2]  90.68,41.15 0 bottom
FD25  FIDUCIAL1X2  [FIDUCIAL-1X2]  114.05,12.57 0 top
FD26  FIDUCIAL1X2  [FIDUCIAL-1X2]  106.43,41.15 0 top
FD27  FIDUCIAL1X2  [FIDUCIAL-1X2]  114.05,12.57 0 bottom
FD28  FIDUCIAL1X2  [FIDUCIAL-1X2]  106.43,41.15 0 bottom
FD29  FIDUCIAL1X2  [FIDUCIAL-1X2]  129.79,12.57 0 top
FD30  FIDUCIAL1X2  [FIDUCIAL-1X2]  122.17,41.15 0 top
FD31  FIDUCIAL1X2  [FIDUCIAL-1X2]  129.79,12.57 0 bottom
FD32  FIDUCIAL1X2  [FIDUCIAL-1X2]  122.17,41.15 0 bottom
FD33  FIDUCIAL1X2  [FIDUCIAL-1X2]  145.54,12.57 0 top
FD34  FIDUCIAL1X2  [FIDUCIAL-1X2]  137.92,41.15 0 top
FD35  FIDUCIAL1X2  [FIDUCIAL-1X2]  145.54,12.57 0 bottom
FD36  FIDUCIAL1X2  [FIDUCIAL-1X2]  137.92,41.15 0 bottom
FD37  FIDUCIAL1X2  [FIDUCIAL-1X2]  161.29,12.57 0 top
FD38  FIDUCIAL1X2  [FIDUCIAL-1X2]  153.67,41.15 0 top
FD39  FIDUCIAL1X2  [FIDUCIAL-1X2]  161.29,12.57 0 bottom
FD40  FIDUCIAL1X2  [FIDUCIAL-1X2]  153.67,41.15 0 bottom
FD41  FIDUCIAL1X2  [FIDUCIAL-1X2]  177.04,12.57 0 top
FD42  FIDUCIAL1X2  [FIDUCIAL-1X2]  169.42,41.15 0 top
FD43  FIDUCIAL1X2  [FIDUCIAL-1X2]  177.04,12.57 0 bottom
FD44  FIDUCIAL1X2  [FIDUCIAL-1X2]  169.42,41.15 0 bottom
FD45  FIDUCIAL1X2  [FIDUCIAL-1X2]  192.79,12.57 0 top
FD46  FIDUCIAL1X2  [FIDUCIAL-1X2]  185.17,41.15 0 top
FD47  FIDUCIAL1X2  [FIDUCIAL-1X2]  192.79,12.57 0 bottom
FD48  FIDUCIAL1X2  [FIDUCIAL-1X2]  185.17,41.15 0 bottom
FD49  FIDUCIAL1X2  [FIDUCIAL-1X2]  208.53,12.57 0 top
FD50  FIDUCIAL1X2  [FIDUCIAL-1X2]  200.91,41.15 0 top
FD51  FIDUCIAL1X2  [FIDUCIAL-1X2]  208.53,12.57 0 bottom
FD52  FIDUCIAL1X2  [FIDUCIAL-1X2]  200.91,41.15 0 bottom
FD53  FIDUCIAL1X2  [FIDUCIAL-1X2]  224.28,12.57 0 top
FD54  FIDUCIAL1X2  [FIDUCIAL-1X2]  216.66,41.15 0 top
FD55  FIDUCIAL1X2  [FIDUCIAL-1X2]  224.28,12.57 0 bottom
FD56  FIDUCIAL1X2  [FIDUCIAL-1X2]  216.66,41.15 0 bottom
FD57  FIDUCIAL1X2  [FIDUCIAL-1X2]  19.56,48.64 0 top
FD58  FIDUCIAL1X2  [FIDUCIAL-1X2]  11.94,77.22 0 top
FD59  FIDUCIAL1X2  [FIDUCIAL-1X2]  19.56,48.64 0 bottom
FD60  FIDUCIAL1X2  [FIDUCIAL-1X2]  11.94,77.22 0 bottom
FD61  FIDUCIAL1X2  [FIDUCIAL-1X2]  35.31,48.64 0 top
FD62  FIDUCIAL1X2  [FIDUCIAL-1X2]  27.69,77.22 0 top
FD63  FIDUCIAL1X2  [FIDUCIAL-1X2]  35.31,48.64 0 bottom
FD64  FIDUCIAL1X2  [FIDUCIAL-1X2]  27.69,77.22 0 bottom
FD65  FIDUCIAL1X2  [FIDUCIAL-1X2]  51.05,48.64 0 top
FD66  FIDUCIAL1X2  [FIDUCIAL-1X2]  43.43,77.22 0 top
FD67  FIDUCIAL1X2  [FIDUCIAL-1X2]  51.05,48.64 0 bottom
FD68  FIDUCIAL1X2  [FIDUCIAL-1X2]  43.43,77.22 0 bottom
FD69  FIDUCIAL1X2  [FIDUCIAL-1X2]  66.8,48.64 0 top
FD70  FIDUCIAL1X2  [FIDUCIAL-1X2]  59.18,77.22 0 top
FD71  FIDUCIAL1X2  [FIDUCIAL-1X2]  66.8,48.64 0 bottom
FD72  FIDUCIAL1X2  [FIDUCIAL-1X2]  59.18,77.22 0 bottom
FD73  FIDUCIAL1X2  [FIDUCIAL-1X2]  82.55,48.64 0 top
FD74  FIDUCIAL1X2  [FIDUCIAL-1X2]  74.93,77.22 0 top
FD75  FIDUCIAL1X2  [FIDUCIAL-1X2]  82.55,48.64 0 bottom
FD76  FIDUCIAL1X2  [FIDUCIAL-1X2]  74.93,77.22 0 bottom
FD77  FIDUCIAL1X2  [FIDUCIAL-1X2]  98.3,48.64 0 top
FD78  FIDUCIAL1X2  [FIDUCIAL-1X2]  90.68,77.22 0 top
FD79  FIDUCIAL1X2  [FIDUCIAL-1X2]  98.3,48.64 0 bottom
FD80  FIDUCIAL1X2  [FIDUCIAL-1X2]  90.68,77.22 0 bottom
FD81  FIDUCIAL1X2  [FIDUCIAL-1X2]  114.05,48.64 0 top
FD82  FIDUCIAL1X2  [FIDUCIAL-1X2]  106.43,77.22 0 top
FD83  FIDUCIAL1X2  [FIDUCIAL-1X2]  114.05,48.64 0 bottom
FD84  FIDUCIAL1X2  [FIDUCIAL-1X2]  106.43,77.22 0 bottom
FD85  FIDUCIAL1X2  [FIDUCIAL-1X2]  129.79,48.64 0 top
FD86  FIDUCIAL1X2  [FIDUCIAL-1X2]  122.17,77.22 0 top
FD87  FIDUCIAL1X2  [FIDUCIAL-1X2]  129.79,48.64 0 bottom
FD88  FIDUCIAL1X2  [FIDUCIAL-1X2]  122.17,77.22 0 bottom
FD89  FIDUCIAL1X2  [FIDUCIAL-1X2]  145.54,48.64 0 top
FD90  FIDUCIAL1X2  [FIDUCIAL-1X2]  137.92,77.22 0 top
FD91  FIDUCIAL1X2  [FIDUCIAL-1X2]  145.54,48.64 0 bottom
FD92  FIDUCIAL1X2  [FIDUCIAL-1X2]  137.92,77.22 0 bottom
FD93  FIDUCIAL1X2  [FIDUCIAL-1X2]  161.29,48.64 0 top
FD94  FIDUCIAL1X2  [FIDUCIAL-1X2]  153.67,77.22 0 top
FD95  FIDUCIAL1X2  [FIDUCIAL-1X2]  161.29,48.64 0 bottom
FD96  FIDUCIAL1X2  [FIDUCIAL-1X2]  153.67,77.22 0 bottom
FD97  FIDUCIAL1X2  [FIDUCIAL-1X2]  177.04,48.64 0 top
FD98  FIDUCIAL1X2  [FIDUCIAL-1X2]  169.42,77.22 0 top
FD99  FIDUCIAL1X2  [FIDUCIAL-1X2]  177.04,48.64 0 bottom
FD100  FIDUCIAL1X2  [FIDUCIAL-1X2]  169.42,77.22 0 bottom
FD101  FIDUCIAL1X2  [FIDUCIAL-1X2]  192.79,48.64 0 top
FD102  FIDUCIAL1X2  [FIDUCIAL-1X2]  185.17,77.22 0 top
FD103  FIDUCIAL1X2  [FIDUCIAL-1X2]  192.79,48.64 0 bottom
FD104  FIDUCIAL1X2  [FIDUCIAL-1X2]  185.17,77.22 0 bottom
FD105  FIDUCIAL1X2  [FIDUCIAL-1X2]  208.53,48.64 0 top
FD106  FIDUCIAL1X2  [FIDUCIAL-1X2]  200.91,77.22 0 top
FD107  FIDUCIAL1X2  [FIDUCIAL-1X2]  208.53,48.64 0 bottom
FD108  FIDUCIAL1X2  [FIDUCIAL-1X2]  200.91,77.22 0 bottom
FD109  FIDUCIAL1X2  [FIDUCIAL-1X2]  224.28,48.64 0 top
FD110  FIDUCIAL1X2  [FIDUCIAL-1X2]  216.66,77.22 0 top
FD111  FIDUCIAL1X2  [FIDUCIAL-1X2]  224.28,48.64 0 bottom
FD112  FIDUCIAL1X2  [FIDUCIAL-1X2]  216.66,77.22 0 bottom
FD113  FIDUCIAL1X2  [FIDUCIAL-1X2]  19.56,84.71 0 top
FD114  FIDUCIAL1X2  [FIDUCIAL-1X2]  11.94,113.28 0 top
FD115  FIDUCIAL1X2  [FIDUCIAL-1X2]  19.56,84.71 0 bottom
FD116  FIDUCIAL1X2  [FIDUCIAL-1X2]  11.94,113.28 0 bottom
FD117  FIDUCIAL1X2  [FIDUCIAL-1X2]  35.31,84.71 0 top
FD118  FIDUCIAL1X2  [FIDUCIAL-1X2]  27.69,113.28 0 top
FD119  FIDUCIAL1X2  [FIDUCIAL-1X2]  35.31,84.71 0 bottom
FD120  FIDUCIAL1X2  [FIDUCIAL-1X2]  27.69,113.28 0 bottom
FD121  FIDUCIAL1X2  [FIDUCIAL-1X2]  51.05,84.71 0 top
FD122  FIDUCIAL1X2  [FIDUCIAL-1X2]  43.43,113.28 0 top
FD123  FIDUCIAL1X2  [FIDUCIAL-1X2]  51.05,84.71 0 bottom
FD124  FIDUCIAL1X2  [FIDUCIAL-1X2]  43.43,113.28 0 bottom
FD125  FIDUCIAL1X2  [FIDUCIAL-1X2]  66.8,84.71 0 top
FD126  FIDUCIAL1X2  [FIDUCIAL-1X2]  59.18,113.28 0 top
FD127  FIDUCIAL1X2  [FIDUCIAL-1X2]  66.8,84.71 0 bottom
FD128  FIDUCIAL1X2  [FIDUCIAL-1X2]  59.18,113.28 0 bottom
FD129  FIDUCIAL1X2  [FIDUCIAL-1X2]  82.55,84.71 0 top
FD130  FIDUCIAL1X2  [FIDUCIAL-1X2]  74.93,113.28 0 top
FD131  FIDUCIAL1X2  [FIDUCIAL-1X2]  82.55,84.71 0 bottom
FD132  FIDUCIAL1X2  [FIDUCIAL-1X2]  74.93,113.28 0 bottom
FD133  FIDUCIAL1X2  [FIDUCIAL-1X2]  98.3,84.71 0 top
FD134  FIDUCIAL1X2  [FIDUCIAL-1X2]  90.68,113.28 0 top
FD135  FIDUCIAL1X2  [FIDUCIAL-1X2]  98.3,84.71 0 bottom
FD136  FIDUCIAL1X2  [FIDUCIAL-1X2]  90.68,113.28 0 bottom
FD137  FIDUCIAL1X2  [FIDUCIAL-1X2]  114.05,84.71 0 top
FD138  FIDUCIAL1X2  [FIDUCIAL-1X2]  106.43,113.28 0 top
FD139  FIDUCIAL1X2  [FIDUCIAL-1X2]  114.05,84.71 0 bottom
FD140  FIDUCIAL1X2  [FIDUCIAL-1X2]  106.43,113.28 0 bottom
FD141  FIDUCIAL1X2  [FIDUCIAL-1X2]  129.79,84.71 0 top
FD142  FIDUCIAL1X2  [FIDUCIAL-1X2]  122.17,113.28 0 top
FD143  FIDUCIAL1X2  [FIDUCIAL-1X2]  129.79,84.71 0 bottom
FD144  FIDUCIAL1X2  [FIDUCIAL-1X2]  122.17,113.28 0 bottom
FD145  FIDUCIAL1X2  [FIDUCIAL-1X2]  145.54,84.71 0 top
FD146  FIDUCIAL1X2  [FIDUCIAL-1X2]  137.92,113.28 0 top
FD147  FIDUCIAL1X2  [FIDUCIAL-1X2]  145.54,84.71 0 bottom
FD148  FIDUCIAL1X2  [FIDUCIAL-1X2]  137.92,113.28 0 bottom
FD149  FIDUCIAL1X2  [FIDUCIAL-1X2]  161.29,84.71 0 top
FD150  FIDUCIAL1X2  [FIDUCIAL-1X2]  153.67,113.28 0 top
FD151  FIDUCIAL1X2  [FIDUCIAL-1X2]  161.29,84.71 0 bottom
FD152  FIDUCIAL1X2  [FIDUCIAL-1X2]  153.67,113.28 0 bottom
FD153  FIDUCIAL1X2  [FIDUCIAL-1X2]  177.04,84.71 0 top
FD154  FIDUCIAL1X2  [FIDUCIAL-1X2]  169.42,113.28 0 top
FD155  FIDUCIAL1X2  [FIDUCIAL-1X2]  177.04,84.71 0 bottom
FD156  FIDUCIAL1X2  [FIDUCIAL-1X2]  169.42,113.28 0 bottom
FD157  FIDUCIAL1X2  [FIDUCIAL-1X2]  192.79,84.71 0 top
FD158  FIDUCIAL1X2  [FIDUCIAL-1X2]  185.17,113.28 0 top
FD159  FIDUCIAL1X2  [FIDUCIAL-1X2]  192.79,84.71 0 bottom
FD160  FIDUCIAL1X2  [FIDUCIAL-1X2]  185.17,113.28 0 bottom
FD161  FIDUCIAL1X2  [FIDUCIAL-1X2]  208.53,84.71 0 top
FD162  FIDUCIAL1X2  [FIDUCIAL-1X2]  200.91,113.28 0 top
FD163  FIDUCIAL1X2  [FIDUCIAL-1X2]  208.53,84.71 0 bottom
FD164  FIDUCIAL1X2  [FIDUCIAL-1X2]  200.91,113.28 0 bottom
FD165  FIDUCIAL1X2  [FIDUCIAL-1X2]  224.28,84.71 0 top
FD166  FIDUCIAL1X2  [FIDUCIAL-1X2]  216.66,113.28 0 top
FD167  FIDUCIAL1X2  [FIDUCIAL-1X2]  224.28,84.71 0 bottom
FD168  FIDUCIAL1X2  [FIDUCIAL-1X2]  216.66,113.28 0 bottom
H1  STAND-OFF  [STAND-OFF]  25.15,39.88 0 top
H2  STAND-OFF  [STAND-OFF]  9.4,39.88 0 top
H3  STAND-OFF  [STAND-OFF]  40.89,39.88 0 top
H4  STAND-OFF  [STAND-OFF]  56.64,39.88 0 top
H5  STAND-OFF  [STAND-OFF]  72.39,39.88 0 top
H6  STAND-OFF  [STAND-OFF]  88.14,39.88 0 top
H7  STAND-OFF  [STAND-OFF]  103.89,39.88 0 top
H8  STAND-OFF  [STAND-OFF]  119.63,39.88 0 top
H9  STAND-OFF  [STAND-OFF]  135.38,39.88 0 top
H10  STAND-OFF  [STAND-OFF]  151.13,39.88 0 top
H11  STAND-OFF  [STAND-OFF]  166.88,39.88 0 top
H12  STAND-OFF  [STAND-OFF]  182.63,39.88 0 top
H13  STAND-OFF  [STAND-OFF]  198.37,39.88 0 top
H14  STAND-OFF  [STAND-OFF]  214.12,39.88 0 top
H15  STAND-OFF  [STAND-OFF]  9.4,75.95 0 top
H16  STAND-OFF  [STAND-OFF]  25.15,75.95 0 top
H17  STAND-OFF  [STAND-OFF]  40.89,75.95 0 top
H18  STAND-OFF  [STAND-OFF]  56.64,75.95 0 top
H19  STAND-OFF  [STAND-OFF]  72.39,75.95 0 top
H20  STAND-OFF  [STAND-OFF]  88.14,75.95 0 top
H21  STAND-OFF  [STAND-OFF]  103.89,75.95 0 top
H22  STAND-OFF  [STAND-OFF]  119.63,75.95 0 top
H23  STAND-OFF  [STAND-OFF]  135.38,75.95 0 top
H24  STAND-OFF  [STAND-OFF]  151.13,75.95 0 top
H25  STAND-OFF  [STAND-OFF]  166.88,75.95 0 top
H26  STAND-OFF  [STAND-OFF]  182.63,75.95 0 top
H27  STAND-OFF  [STAND-OFF]  198.37,75.95 0 top
H28  STAND-OFF  [STAND-OFF]  214.12,75.95 0 top
H29  STAND-OFF  [STAND-OFF]  9.4,112.01 0 top
H30  STAND-OFF  [STAND-OFF]  25.15,112.01 0 top
H31  STAND-OFF  [STAND-OFF]  40.89,112.01 0 top
H32  STAND-OFF  [STAND-OFF]  56.64,112.01 0 top
H33  STAND-OFF  [STAND-OFF]  72.39,112.01 0 top
H34  STAND-OFF  [STAND-OFF]  88.14,112.01 0 top
H35  STAND-OFF  [STAND-OFF]  103.89,112.01 0 top
H36  STAND-OFF  [STAND-OFF]  119.63,112.01 0 top
H37  STAND-OFF  [STAND-OFF]  135.38,112.01 0 top
H38  STAND-OFF  [STAND-OFF]  151.13,112.01 0 top
H39  STAND-OFF  [STAND-OFF]  166.88,112.01 0 top
H40  STAND-OFF  [STAND-OFF]  182.63,112.01 0 top
H41  STAND-OFF  [STAND-OFF]  198.37,112.01 0 top
H42  STAND-OFF  [STAND-OFF]  214.12,112.01 0 top
J1  [1X06_NO_SILK]  23.88,8.13 180 bottom
J2  [1X06_NO_SILK]  8.13,8.13 180 bottom
J3  [1X06_NO_SILK]  39.62,8.13 180 bottom
J4  [1X06_NO_SILK]  55.37,8.13 180 bottom
J5  [1X06_NO_SILK]  71.12,8.13 180 bottom
J6  [1X06_NO_SILK]  86.87,8.13 180 bottom
J7  [1X06_NO_SILK]  102.62,8.13 180 bottom
J8  [1X06_NO_SILK]  118.36,8.13 180 bottom
J9  [1X06_NO_SILK]  134.11,8.13 180 bottom
J10  [1X06_NO_SILK]  149.86,8.13 180 bottom
J11  [1X06_NO_SILK]  165.61,8.13 180 bottom
J12  [1X06_NO_SILK]  181.36,8.13 180 bottom
J13  [1X06_NO_SILK]  197.1,8.13 180 bottom
J14  [1X06_NO_SILK]  212.85,8.13 180 bottom
J15  [1X06_NO_SILK]  8.13,44.2 180 bottom
J16  [1X06_NO_SILK]  23.88,44.2 180 bottom
J17  [1X06_NO_SILK]  39.62,44.2 180 bottom
J18  [1X06_NO_SILK]  55.37,44.2 180 bottom
J19  [1X06_NO_SILK]  71.12,44.2 180 bottom
J20  [1X06_NO_SILK]  86.87,44.2 180 bottom
J21  [1X06_NO_SILK]  102.62,44.2 180 bottom
J22  [1X06_NO_SILK]  118.36,44.2 180 bottom
J23  [1X06_NO_SILK]  134.11,44.2 180 bottom
J24  [1X06_NO_SILK]  149.86,44.2 180 bottom
J25  [1X06_NO_SILK]  165.61,44.2 180 bottom
J26  [1X06_NO_SILK]  181.36,44.2 180 bottom
J27  [1X06_NO_SILK]  197.1,44.2 180 bottom
J28  [1X06_NO_SILK]  212.85,44.2 180 bottom
J29  [1X06_NO_SILK]  8.13,80.26 180 bottom
J30  [1X06_NO_SILK]  23.88,80.26 180 bottom
J31  [1X06_NO_SILK]  39.62,80.26 180 bottom
J32  [1X06_NO_SILK]  55.37,80.26 180 bottom
J33  [1X06_NO_SILK]  71.12,80.26 180 bottom
J34  [1X06_NO_SILK]  86.87,80.26 180 bottom
J35  [1X06_NO_SILK]  102.62,80.26 180 bottom
J36  [1X06_NO_SILK]  118.36,80.26 180 bottom
J37  [1X06_NO_SILK]  134.11,80.26 180 bottom
J38  [1X06_NO_SILK]  149.86,80.26 180 bottom
J39  [1X06_NO_SILK]  165.61,80.26 180 bottom
J40  [1X06_NO_SILK]  181.36,80.26 180 bottom
J41  [1X06_NO_SILK]  197.1,80.26 180 bottom
J42  [1X06_NO_SILK]  212.85,80.26 180 bottom
L1  10uH  [INDUCTOR_4.7UH]  14.48,36.07 0 top
L2  10uH  [INDUCTOR_4.7UH]  30.23,36.07 0 top
L3  10uH  [INDUCTOR_4.7UH]  45.97,36.07 0 top
L4  10uH  [INDUCTOR_4.7UH]  61.72,36.07 0 top
L5  10uH  [INDUCTOR_4.7UH]  77.47,36.07 0 top
L6  10uH  [INDUCTOR_4.7UH]  93.22,36.07 0 top
L7  10uH  [INDUCTOR_4.7UH]  108.97,36.07 0 top
L8  10uH  [INDUCTOR_4.7UH]  124.71,36.07 0 top
L9  10uH  [INDUCTOR_4.7UH]  140.46,36.07 0 top
L10  10uH  [INDUCTOR_4.7UH]  156.21,36.07 0 top
L11  10uH  [INDUCTOR_4.7UH]  171.96,36.07 0 top
L12  10uH  [INDUCTOR_4.7UH]  187.71,36.07 0 top
L13  10uH  [INDUCTOR_4.7UH]  203.45,36.07 0 top
L14  10uH  [INDUCTOR_4.7UH]  219.2,36.07 0 top
L15  10uH  [INDUCTOR_4.7UH]  14.48,72.14 0 top
L16  10uH  [INDUCTOR_4.7UH]  30.23,72.14 0 top
L17  10uH  [INDUCTOR_4.7UH]  45.97,72.14 0 top
L18  10uH  [INDUCTOR_4.7UH]  61.72,72.14 0 top
L19  10uH  [INDUCTOR_4.7UH]  77.47,72.14 0 top
L20  10uH  [INDUCTOR_4.7UH]  93.22,72.14 0 top
L21  10uH  [INDUCTOR_4.7UH]  108.97,72.14 0 top
L22  10uH  [INDUCTOR_4.7UH]  124.71,72.14 0 top
L23  10uH  [INDUCTOR_4.7UH]  140.46,72.14 0 top
L24  10uH  [INDUCTOR_4.7UH]  156.21,72.14 0 top
L25  10uH  [INDUCTOR_4.7UH]  171.96,72.14 0 top
L26  10uH  [INDUCTOR_4.7UH]  187.71,72.14 0 top
L27  10uH  [INDUCTOR_4.7UH]  203.45,72.14 0 top
L28  10uH  [INDUCTOR_4.7UH]  219.2,72.14 0 top
L29  10uH  [INDUCTOR_4.7UH]  14.48,108.2 0 top
L30  10uH  [INDUCTOR_4.7UH]  30.23,108.2 0 top
L31  10uH  [INDUCTOR_4.7UH]  45.97,108.2 0 top
L32  10uH  [INDUCTOR_4.7UH]  61.72,108.2 0 top
L33  10uH  [INDUCTOR_4.7UH]  77.47,108.2 0 top
L34  10uH  [INDUCTOR_4.7UH]  93.22,108.2 0 top
L35  10uH  [INDUCTOR_4.7UH]  108.97,108.2 0 top
L36  10uH  [INDUCTOR_4.7UH]  124.71,108.2 0 top
L37  10uH  [INDUCTOR_4.7UH]  140.46,108.2 0 top
L38  10uH  [INDUCTOR_4.7UH]  156.21,108.2 0 top
L39  10uH  [INDUCTOR_4.7UH]  171.96,108.2 0 top
L40  10uH  [INDUCTOR_4.7UH]  187.71,108.2 0 top
L41  10uH  [INDUCTOR_4.7UH]  203.45,108.2 0 top
L42  10uH  [INDUCTOR_4.7UH]  219.2,108.2 0 top
LOGO1  SFE_LOGO_NAME_FLAME.1_INCH  [SFE_LOGO_NAME_FLAME_.1]  20.45,29.72 0 bottom
LOGO2  SFE_LOGO_NAME_FLAME.1_INCH  [SFE_LOGO_NAME_FLAME_.1]  36.2,29.72 0 bottom
LOGO3  SFE_LOGO_FLAME.1_INCH  [SFE_LOGO_FLAME_.1]  13.34,38.23 0 top
LOGO4  OSHW-LOGOS  [OSHW-LOGO-S]  14.48,39.88 0 bottom
LOGO5  SFE_LOGO_FLAME.1_INCH  [SFE_LOGO_FLAME_.1]  29.08,38.23 0 top
LOGO6  OSHW-LOGOS  [OSHW-LOGO-S]  30.23,39.88 0 bottom
LOGO7  SFE_LOGO_NAME_FLAME.1_INCH  [SFE_LOGO_NAME_FLAME_.1]  51.94,29.72 0 bottom
LOGO8  SFE_LOGO_FLAME.1_INCH  [SFE_LOGO_FLAME_.1]  44.83,38.23 0 top
LOGO9  OSHW-LOGOS  [OSHW-LOGO-S]  45.97,39.88 0 bottom
LOGO10  SFE_LOGO_NAME_FLAME.1_INCH  [SFE_LOGO_NAME_FLAME_.1]  67.69,29.72 0 bottom
LOGO11  SFE_LOGO_FLAME.1_INCH  [SFE_LOGO_FLAME_.1]  60.58,38.23 0 top
LOGO12  OSHW-LOGOS  [OSHW-LOGO-S]  61.72,39.88 0 bottom
LOGO13  SFE_LOGO_NAME_FLAME.1_INCH  [SFE_LOGO_NAME_FLAME_.1]  83.44,29.72 0 bottom
LOGO14  SFE_LOGO_FLAME.1_INCH  [SFE_LOGO_FLAME_.1]  76.33,38.23 0 top
LOGO15  OSHW-LOGOS  [OSHW-LOGO-S]  77.47,39.88 0 bottom
LOGO16  SFE_LOGO_NAME_FLAME.1_INCH  [SFE_LOGO_NAME_FLAME_.1]  99.19,29.72 0 bottom
LOGO17  SFE_LOGO_FLAME.1_INCH  [SFE_LOGO_FLAME_.1]  92.08,38.23 0 top
LOGO18  OSHW-LOGOS  [OSHW-LOGO-S]  93.22,39.88 0 bottom
LOGO19  SFE_LOGO_NAME_FLAME.1_INCH  [SFE_LOGO_NAME_FLAME_.1]  114.94,29.72 0 bottom
LOGO20  SFE_LOGO_FLAME.1_INCH  [SFE_LOGO_FLAME_.1]  107.82,38.23 0 top
LOGO21  OSHW-LOGOS  [OSHW-LOGO-S]  108.97,39.88 0 bottom
LOGO22  SFE_LOGO_NAME_FLAME.1_INCH  [SFE_LOGO_NAME_FLAME_.1]  130.68,29.72 0 bottom
LOGO23  SFE_LOGO_FLAME.1_INCH  [SFE_LOGO_FLAME_.1]  123.57,38.23 0 top
LOGO24  OSHW-LOGOS  [OSHW-LOGO-S]  124.71,39.88 0 bottom
LOGO25  SFE_LOGO_NAME_FLAME.1_INCH  [SFE_LOGO_NAME_FLAME_.1]  146.43,29.72 0 bottom
LOGO26  SFE_LOGO_FLAME.1_INCH  [SFE_LOGO_FLAME_.1]  139.32,38.23 0 top
LOGO27  OSHW-LOGOS  [OSHW-LOGO-S]  140.46,39.88 0 bottom
LOGO28  SFE_LOGO_NAME_FLAME.1_INCH  [SFE_LOGO_NAME_FLAME_.1]  162.18,29.72 0 bottom
LOGO29  SFE_LOGO_FLAME.1_INCH  [SFE_LOGO_FLAME_.1]  155.07,38.23 0 top
LOGO30  OSHW-LOGOS  [OSHW-LOGO-S]  156.21,39.88 0 bottom
LOGO31  SFE_LOGO_NAME_FLAME.1_INCH  [SFE_LOGO_NAME_FLAME_.1]  177.93,29.72 0 bottom
LOGO32  SFE_LOGO_FLAME.1_INCH  [SFE_LOGO_FLAME_.1]  170.81,38.23 0 top
LOGO33  OSHW-LOGOS  [OSHW-LOGO-S]  171.96,39.88 0 bottom
LOGO34  SFE_LOGO_NAME_FLAME.1_INCH  [SFE_LOGO_NAME_FLAME_.1]  193.68,29.72 0 bottom
LOGO35  SFE_LOGO_FLAME.1_INCH  [SFE_LOGO_FLAME_.1]  186.56,38.23 0 top
LOGO36  OSHW-LOGOS  [OSHW-LOGO-S]  187.71,39.88 0 bottom
LOGO37  SFE_LOGO_NAME_FLAME.1_INCH  [SFE_LOGO_NAME_FLAME_.1]  209.42,29.72 0 bottom
LOGO38  SFE_LOGO_FLAME.1_INCH  [SFE_LOGO_FLAME_.1]  202.31,38.23 0 top
LOGO39  OSHW-LOGOS  [OSHW-LOGO-S]  203.45,39.88 0 bottom
LOGO40  SFE_LOGO_NAME_FLAME.1_INCH  [SFE_LOGO_NAME_FLAME_.1]  225.17,29.72 0 bottom
LOGO41  SFE_LOGO_FLAME.1_INCH  [SFE_LOGO_FLAME_.1]  218.06,38.23 0 top
LOGO42  OSHW-LOGOS  [OSHW-LOGO-S]  219.2,39.88 0 bottom
LOGO43  SFE_LOGO_NAME_FLAME.1_INCH  [SFE_LOGO_NAME_FLAME_.1]  20.45,65.79 0 bottom
LOGO44  SFE_LOGO_FLAME.1_INCH  [SFE_LOGO_FLAME_.1]  13.34,74.3 0 top
LOGO45  OSHW-LOGOS  [OSHW-LOGO-S]  14.48,75.95 0 bottom
LOGO46  SFE_LOGO_NAME_FLAME.1_INCH  [SFE_LOGO_NAME_FLAME_.1]  36.2,65.79 0 bottom
LOGO47  SFE_LOGO_FLAME.1_INCH  [SFE_LOGO_FLAME_.1]  29.08,74.3 0 top
LOGO48  OSHW-LOGOS  [OSHW-LOGO-S]  30.23,75.95 0 bottom
LOGO49  SFE_LOGO_NAME_FLAME.1_INCH  [SFE_LOGO_NAME_FLAME_.1]  51.94,65.79 0 bottom
LOGO50  SFE_LOGO_FLAME.1_INCH  [SFE_LOGO_FLAME_.1]  44.83,74.3 0 top
LOGO51  OSHW-LOGOS  [OSHW-LOGO-S]  45.97,75.95 0 bottom
LOGO52  SFE_LOGO_NAME_FLAME.1_INCH  [SFE_LOGO_NAME_FLAME_.1]  67.69,65.79 0 bottom
LOGO53  SFE_LOGO_FLAME.1_INCH  [SFE_LOGO_FLAME_.1]  60.58,74.3 0 top
LOGO54  OSHW-LOGOS  [OSHW-LOGO-S]  61.72,75.95 0 bottom
LOGO55  SFE_LOGO_NAME_FLAME.1_INCH  [SFE_LOGO_NAME_FLAME_.1]  83.44,65.79 0 bottom
LOGO56  SFE_LOGO_FLAME.1_INCH  [SFE_LOGO_FLAME_.1]  76.33,74.3 0 top
LOGO57  OSHW-LOGOS  [OSHW-LOGO-S]  77.47,75.95 0 bottom
LOGO58  SFE_LOGO_NAME_FLAME.1_INCH  [SFE_LOGO_NAME_FLAME_.1]  99.19,65.79 0 bottom
LOGO59  SFE_LOGO_FLAME.1_INCH  [SFE_LOGO_FLAME_.1]  92.08,74.3 0 top
LOGO60  OSHW-LOGOS  [OSHW-LOGO-S]  93.22,75.95 0 bottom
LOGO61  SFE_LOGO_NAME_FLAME.1_INCH  [SFE_LOGO_NAME_FLAME_.1]  114.94,65.79 0 bottom
LOGO62  SFE_LOGO_FLAME.1_INCH  [SFE_LOGO_FLAME_.1]  107.82,74.3 0 top
LOGO63  OSHW-LOGOS  [OSHW-LOGO-S]  108.97,75.95 0 bottom
LOGO64  SFE_LOGO_NAME_FLAME.1_INCH  [SFE_LOGO_NAME_FLAME_.1]  130.68,65.79 0 bottom
LOGO65  SFE_LOGO_FLAME.1_INCH  [SFE_LOGO_FLAME_.1]  123.57,74.3 0 top
LOGO66  OSHW-LOGOS  [OSHW-LOGO-S]  124.71,75.95 0 bottom
LOGO67  SFE_LOGO_NAME_FLAME.1_INCH  [SFE_LOGO_NAME_FLAME_.1]  146.43,65.79 0 bottom
LOGO68  SFE_LOGO_FLAME.1_INCH  [SFE_LOGO_FLAME_.1]  139.32,74.3 0 top
LOGO69  OSHW-LOGOS  [OSHW-LOGO-S]  140.46,75.95 0 bottom
LOGO70  SFE_LOGO_NAME_FLAME.1_INCH  [SFE_LOGO_NAME_FLAME_.1]  162.18,65.79 0 bottom
LOGO71  SFE_LOGO_FLAME.1_INCH  [SFE_LOGO_FLAME_.1]  155.07,74.3 0 top
LOGO72  OSHW-LOGOS  [OSHW-LOGO-S]  156.21,75.95 0 bottom
LOGO73  SFE_LOGO_NAME_FLAME.1_INCH  [SFE_LOGO_NAME_FLAME_.1]  177.93,65.79 0 bottom
LOGO74  SFE_LOGO_FLAME.1_INCH  [SFE_LOGO_FLAME_.1]  170.81,74.3 0 top
LOGO75  OSHW-LOGOS  [OSHW-LOGO-S]  171.96,75.95 0 bottom
LOGO76  SFE_LOGO_NAME_FLAME.1_INCH  [SFE_LOGO_NAME_FLAME_.1]  193.68,65.79 0 bottom
LOGO77  SFE_LOGO_FLAME.1_INCH  [SFE_LOGO_FLAME_.1]  186.56,74.3 0 top
LOGO78  OSHW-LOGOS  [OSHW-LOGO-S]  187.71,75.95 0 bottom
LOGO79  SFE_LOGO_NAME_FLAME.1_INCH  [SFE_LOGO_NAME_FLAME_.1]  209.42,65.79 0 bottom
LOGO80  SFE_LOGO_FLAME.1_INCH  [SFE_LOGO_FLAME_.1]  202.31,74.3 0 top
LOGO81  OSHW-LOGOS  [OSHW-LOGO-S]  203.45,75.95 0 bottom
LOGO82  SFE_LOGO_NAME_FLAME.1_INCH  [SFE_LOGO_NAME_FLAME_.1]  225.17,65.79 0 bottom
LOGO83  SFE_LOGO_FLAME.1_INCH  [SFE_LOGO_FLAME_.1]  218.06,74.3 0 top
LOGO84  OSHW-LOGOS  [OSHW-LOGO-S]  219.2,75.95 0 bottom
LOGO85  SFE_LOGO_NAME_FLAME.1_INCH  [SFE_LOGO_NAME_FLAME_.1]  20.45,101.85 0 bottom
LOGO86  SFE_LOGO_FLAME.1_INCH  [SFE_LOGO_FLAME_.1]  13.34,110.36 0 top
LOGO87  OSHW-LOGOS  [OSHW-LOGO-S]  14.48,112.01 0 bottom
LOGO88  SFE_LOGO_NAME_FLAME.1_INCH  [SFE_LOGO_NAME_FLAME_.1]  36.2,101.85 0 bottom
LOGO89  SFE_LOGO_FLAME.1_INCH  [SFE_LOGO_FLAME_.1]  29.08,110.36 0 top
LOGO90  OSHW-LOGOS  [OSHW-LOGO-S]  30.23,112.01 0 bottom
LOGO91  SFE_LOGO_NAME_FLAME.1_INCH  [SFE_LOGO_NAME_FLAME_.1]  51.94,101.85 0 bottom
LOGO92  SFE_LOGO_FLAME.1_INCH  [SFE_LOGO_FLAME_.1]  44.83,110.36 0 top
LOGO93  OSHW-LOGOS  [OSHW-LOGO-S]  45.97,112.01 0 bottom
LOGO94  SFE_LOGO_NAME_FLAME.1_INCH  [SFE_LOGO_NAME_FLAME_.1]  67.69,101.85 0 bottom
LOGO95  SFE_LOGO_FLAME.1_INCH  [SFE_LOGO_FLAME_.1]  60.58,110.36 0 top
LOGO96  OSHW-LOGOS  [OSHW-LOGO-S]  61.72,112.01 0 bottom
LOGO97  SFE_LOGO_NAME_FLAME.1_INCH  [SFE_LOGO_NAME_FLAME_.1]  83.44,101.85 0 bottom
LOGO98  SFE_LOGO_FLAME.1_INCH  [SFE_LOGO_FLAME_.1]  76.33,110.36 0 top
LOGO99  OSHW-LOGOS  [OSHW-LOGO-S]  77.47,112.01 0 bottom
LOGO100  SFE_LOGO_NAME_FLAME.1_INCH  [SFE_LOGO_NAME_FLAME_.1]  99.19,101.85 0 bottom
LOGO101  SFE_LOGO_FLAME.1_INCH  [SFE_LOGO_FLAME_.1]  92.08,110.36 0 top
LOGO102  OSHW-LOGOS  [OSHW-LOGO-S]  93.22,112.01 0 bottom
LOGO103  SFE_LOGO_NAME_FLAME.1_INCH  [SFE_LOGO_NAME_FLAME_.1]  114.94,101.85 0 bottom
LOGO104  SFE_LOGO_FLAME.1_INCH  [SFE_LOGO_FLAME_.1]  107.82,110.36 0 top
LOGO105  OSHW-LOGOS  [OSHW-LOGO-S]  108.97,112.01 0 bottom
LOGO106  SFE_LOGO_NAME_FLAME.1_INCH  [SFE_LOGO_NAME_FLAME_.1]  130.68,101.85 0 bottom
LOGO107  SFE_LOGO_FLAME.1_INCH  [SFE_LOGO_FLAME_.1]  123.57,110.36 0 top
LOGO108  OSHW-LOGOS  [OSHW-LOGO-S]  124.71,112.01 0 bottom
LOGO109  SFE_LOGO_NAME_FLAME.1_INCH  [SFE_LOGO_NAME_FLAME_.1]  146.43,101.85 0 bottom
LOGO110  SFE_LOGO_FLAME.1_INCH  [SFE_LOGO_FLAME_.1]  139.32,110.36 0 top
LOGO111  OSHW-LOGOS  [OSHW-LOGO-S]  140.46,112.01 0 bottom
LOGO112  SFE_LOGO_NAME_FLAME.1_INCH  [SFE_LOGO_NAME_FLAME_.1]  162.18,101.85 0 bottom
LOGO113  SFE_LOGO_FLAME.1_INCH  [SFE_LOGO_FLAME_.1]  155.07,110.36 0 top
LOGO114  OSHW-LOGOS  [OSHW-LOGO-S]  156.21,112.01 0 bottom
LOGO115  SFE_LOGO_NAME_FLAME.1_INCH  [SFE_LOGO_NAME_FLAME_.1]  177.93,101.85 0 bottom
LOGO116  SFE_LOGO_FLAME.1_INCH  [SFE_LOGO_FLAME_.1]  170.81,110.36 0 top
LOGO117  OSHW-LOGOS  [OSHW-LOGO-S]  171.96,112.01 0 bottom
LOGO118  SFE_LOGO_NAME_FLAME.1_INCH  [SFE_LOGO_NAME_FLAME_.1]  193.68,101.85 0 bottom
LOGO119  SFE_LOGO_FLAME.1_INCH  [SFE_LOGO_FLAME_.1]  186.56,110.36 0 top
LOGO120  OSHW-LOGOS  [OSHW-LOGO-S]  187.71,112.01 0 bottom
LOGO121  SFE_LOGO_NAME_FLAME.1_INCH  [SFE_LOGO_NAME_FLAME_.1]  209.42,101.85 0 bottom
LOGO122  SFE_LOGO_FLAME.1_INCH  [SFE_LOGO_FLAME_.1]  202.31,110.36 0 top